# EAGLE board test4 (EAGLE 7.6.0)
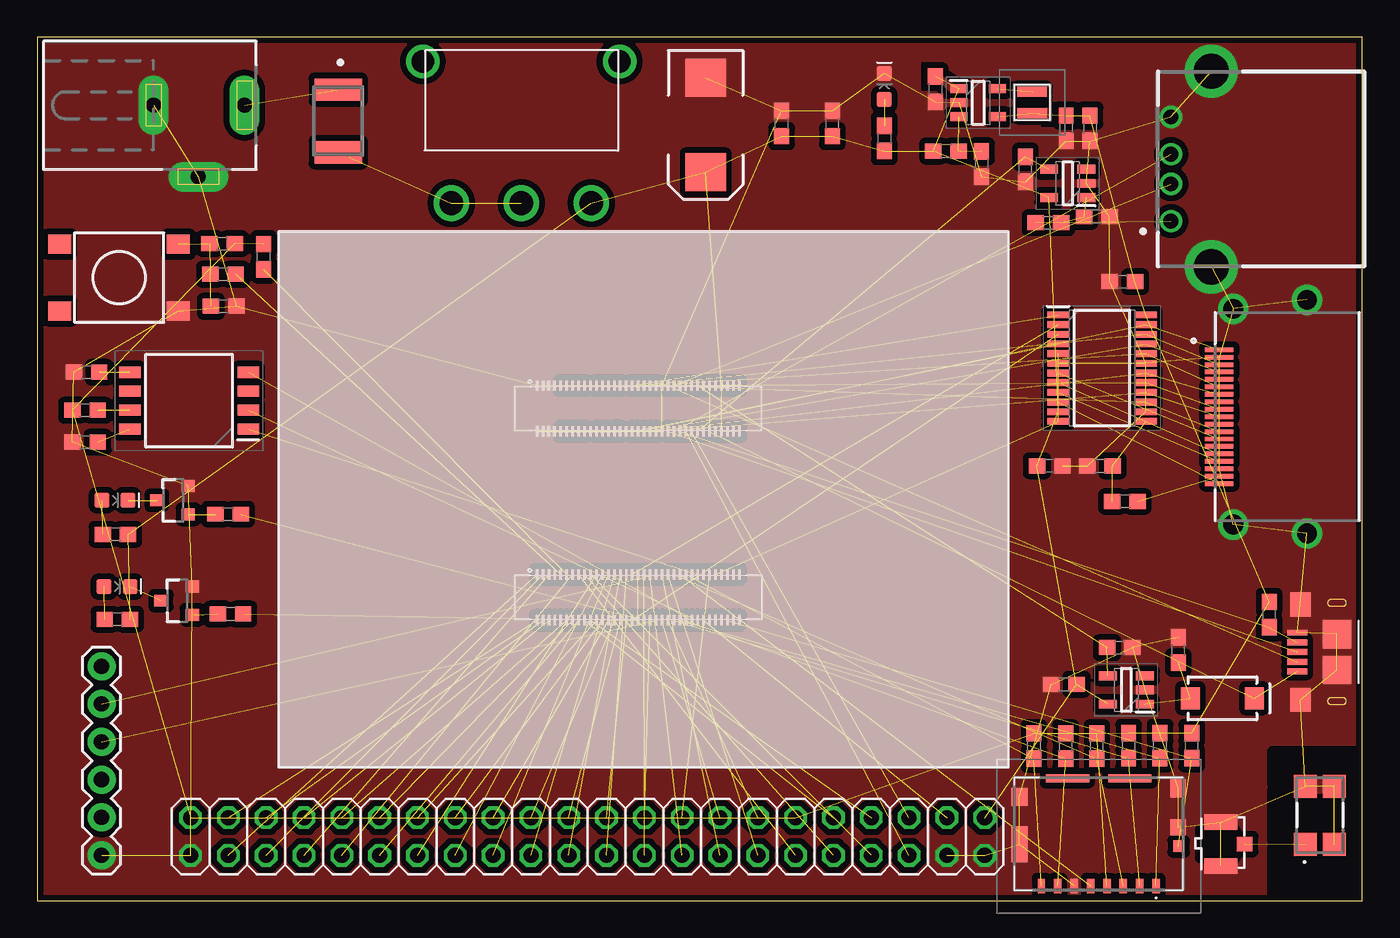
[diagram p0: board, top side]
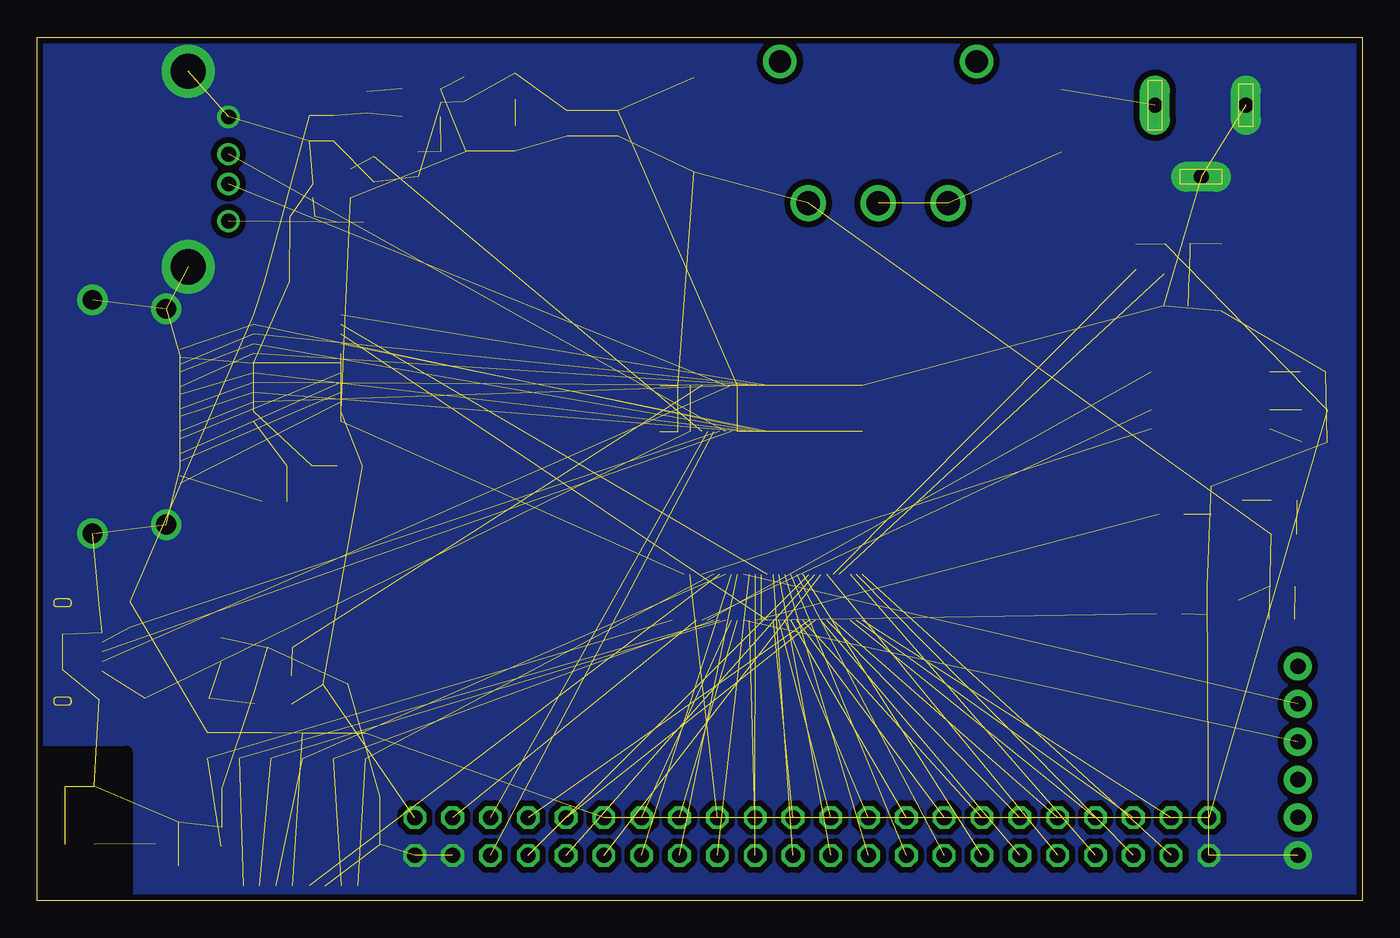
[diagram p1: board, bottom side, seen from below]

Size 89 x 58 mm. Coordinates in mm from the lower left corner, seen from the top.
Outline: 89,0 89,58 0,58 0,0 89,0
Copper layers (1*16): Top 0.035559375mm / dielectric 1.6mm / Bottom 0.035559375mm
Design rules "oshpark-2layer *": minimum track width 5mil, minimum drill 10mil, track to track 5mil, track to pad 5mil, pad to pad 5mil, via to via 5mil, smd to smd 5mil, copper to edge 15mil, drill to drill 6mil, minimum pad ring 5mil, minimum via ring 5mil, stop-mask expansion 2.5mil, vias tented up to drill 16mil, thermal gap 10mil
Net classes: 1 differential: width 0.127 mm, drill 0.3 mm, clearance 0.127 mm
bKeepout: area 78.2,2.9 to 83,4.7
tRestrict: area 78.1,2.9 to 80.4,4.7; area 83,0 to 89,2.8; area 83,2.8 to 84.3,3.6; area 83,4 to 84.3,7.4; area 83,7.9 to 84.3,8.6; area 83,8.6 to 89,10; area 84.3,4.7 to 86.9,6.8; area 87.3,4.7 to 89,6.8; area 88,2.7 to 89,4.7; area 88,6.8 to 89,8.6
bRestrict: area 83,0 to 89,10

## Footprints (pad centres in the part's own frame; a part is rotated, then mirrored left to right if it is on the bottom)
SOT95P284X122-5N = smd 1.15 x 0.6: 1 -1.3,0.953; 2 -1.3,0; 3 -1.3,-0.953; 4 1.3,-0.953; 5 1.3,0.953
146175-0001 = smd 1.54 x 1.54: 1 -0.97,-1.95; 2 0.97,-1.95; 3 0.97,1.95; 4 -0.97,1.95
EIA7343 = smd 2.55 x 2.7: A 3.17,0; C -3.17,0
0603 = smd 1.1 x 1: 1 -0.85,0; 2 0.85,0
LED-0603 = smd 1 x 1: A -0.877,0; C 0.877,0
SMA-DIODE = smd 1.27 x 1.47: A -2.15,0; C 2.15,0
MF-MSMF260-2 = smd 1.5 x 3.2: 1 -2.1,0; 2 2.1,0
SOT95P280X145-5N = smd 1.2 x 0.6: 1 -1.25,0.95; 2 -1.25,0; 3 -1.25,-0.95; 4 1.25,-0.95; 5 1.25,0.95
SOP65P640X120-24N = smd 1.475 x 0.45: 1 -2.938,3.575; 2 -2.938,2.925; 3 -2.938,2.275; 4 -2.938,1.625; 5 -2.938,0.975; 6 -2.938,0.325; 7 -2.938,-0.325; 8 -2.938,-0.975; 9 -2.938,-1.625; 10 -2.938,-2.275; 11 -2.938,-2.925; 12 -2.938,-3.575; 13 2.938,-3.575; 14 2.938,-2.925; 15 2.938,-2.275; 16 2.938,-1.625; 17 2.938,-0.975; 18 2.938,-0.325; 19 2.938,0.325; 20 2.938,0.975; 21 2.938,1.625; 22 2.938,2.275; 23 2.938,2.925; 24 2.938,3.575
DCJ0202 = drill 1 pad 2 long: 1 0,3.1; 2 4.8,0; 3 0,-3
10118193-0001LF = smd 0.4 x 1.35: D+ 0,2.675; D- -0.65,2.675; GND 1.3,2.675; ID 0.65,2.675; VCC -1.3,2.675 | smd 1.6 x 1.4: SHIELD$1 -3.2,2.45; SHIELD$2 3.2,2.45 | smd 1.9 x 1.9: SHIELD$3 -1.2,0; SHIELD$4 1.2,0
DF40C(2.0)-70DS-0.4V(51) = smd 0.2 x 0.7: 1 0,0; 2 0,-3.08; 3 0.4,0; 4 0.4,-3.08; 5 0.8,0; 6 0.8,-3.08; 7 1.2,0; 8 1.2,-3.08; 9 1.6,0; 10 1.6,-3.08; 11 2,0; 12 2,-3.08; 13 2.4,0; 14 2.4,-3.08; 15 2.8,0; 16 2.8,-3.08; 17 3.2,0; 18 3.2,-3.08; 19 3.6,0; 20 3.6,-3.08; 21 4,0; 22 4,-3.08; 23 4.4,0; 24 4.4,-3.08; 25 4.8,0; 26 4.8,-3.08; 27 5.2,0; 28 5.2,-3.08; 29 5.6,0; 30 5.6,-3.08; 31 6,0; 32 6,-3.08; 33 6.4,0; 34 6.4,-3.08; 35 6.8,0; 36 6.8,-3.08; 37 7.2,0; 38 7.2,-3.08; 39 7.6,0; 40 7.6,-3.08; 41 8,0; 42 8,-3.08; 43 8.4,0; 44 8.4,-3.08; 45 8.8,0; 46 8.8,-3.08; 47 9.2,0; 48 9.2,-3.08; 49 9.6,0; 50 9.6,-3.08; 51 10,0; 52 10,-3.08; 53 10.4,0; 54 10.4,-3.08; 55 10.8,0; 56 10.8,-3.08; 57 11.2,0; 58 11.2,-3.08; 59 11.6,0; 60 11.6,-3.08; 61 12,0; 62 12,-3.08; 63 12.4,0; 64 12.4,-3.08; 65 12.8,0; 66 12.8,-3.08; 67 13.2,0; 68 13.2,-3.08; 69 13.6,0; 70 13.6,-3.08
UE27AC54100 = drill 1 pad 1.5: 1 -3.5,0; 2 -1,0; 3 1,0; 4 3.5,0 | drill 2.38 pad 3.58: 5 -6.57,-2.71; 6 6.57,-2.71
FTDI_BASIC = drill 1.016 pad 1.88: CTS 10.16,0; DTR 0,0; GND 12.7,0; RXI 2.54,0; TXO 5.08,0; VCC 7.62,0
10029449-111RLF_1 = smd 0.3 x 1.9: 1 4.5,0.95; 2 4,0.95; 3 3.5,0.95; 4 3,0.95; 5 2.5,0.95; 6 2,0.95; 7 1.5,0.95; 8 1,0.95; 9 0.5,0.95; 10 0,0.95; 11 -0.5,0.95; 12 -1,0.95; 13 -1.5,0.95; 14 -2,0.95; 15 -2.5,0.95; 16 -3,0.95; 17 -3.5,0.95; 18 -4,0.95; 19 -4.5,0.95 | drill 1.33 pad 2.03: 20 -7.25,0; 21 -7.85,-4.95; 22 7.85,-4.95; 23 7.25,0
1051620001 = smd 0.5 x 1: 1 3.85,-3.335; 2 2.75,-3.335; 3 1.65,-3.335; 4 0.55,-3.335; 5 -0.55,-3.335; 6 -1.65,-3.335; 7 -2.75,-3.335; 8 -3.85,-3.335 | smd 0.72 x 0.78: 9 5.36,-0.655 | smd 1.05 x 1.08: 10 5.325,0.615 | smd 1.05 x 1.2: 11 5.325,3.225; 12 -5.325,2.655 | smd 1.05 x 2.39: 13 -5.325,-0.53 | smd 2.91 x 0.55: 14 -2.095,3.9; 15 2.095,3.9
NRH2412T2R2MNGH = smd 0.7 x 2: 1 -0.725,0; 2 0.725,0
SOT23-3 = smd 0.8 x 0.9: 1 -0.95,-1; 2 0.95,-1; 3 0,1.1
TACTILE_SWITCH_SMD_6.2MM_TALL = smd 1.55 x 1.3: A1 -3.975,-2.25; A2 3.975,-2.25; B1 -3.975,2.25; B2 3.975,2.25
SOIC127P844X265-8N = smd 1.45 x 0.75: 1 -3.975,1.905; 2 -3.975,0.635; 3 -3.975,-0.635; 4 -3.975,-1.905; 5 3.975,-1.905; 6 3.975,-0.635; 7 3.975,0.635; 8 3.975,1.905
2X22 = drill 1.016 octagon: 1 -25.4,-1.27; 2 -25.4,1.27; 3 -22.86,-1.27; 4 -22.86,1.27; 5 -20.32,-1.27; 6 -20.32,1.27; 7 -17.78,-1.27; 8 -17.78,1.27; 9 -15.24,-1.27; 10 -15.24,1.27; 11 -12.7,-1.27; 12 -12.7,1.27; 13 -10.16,-1.27; 14 -10.16,1.27; 15 -7.62,-1.27; 16 -7.62,1.27; 17 -5.08,-1.27; 18 -5.08,1.27; 19 -2.54,-1.27; 20 -2.54,1.27; 21 0,-1.27; 22 0,1.27; 23 2.54,-1.27; 24 2.54,1.27; 25 5.08,-1.27; 26 5.08,1.27; 27 7.62,-1.27; 28 7.62,1.27; 29 10.16,-1.27; 30 10.16,1.27; 31 12.7,-1.27; 32 12.7,1.27; 33 15.24,-1.27; 34 15.24,1.27; 35 17.78,-1.27; 36 17.78,1.27; 37 20.32,-1.27; 38 20.32,1.27; 39 22.86,-1.27; 40 22.86,1.27; 41 25.4,-1.27; 42 25.4,1.27; 43 27.94,-1.27; 44 27.94,1.27
500SSP1S1M6QEA = drill 1.6: 1 -4.8,-5.4; 2 -0.1,-5.4; 3 4.6,-5.4 | drill 1.5: 4 -6.705,4.13; 5 6.505,4.13
U.FL-R-SMT(10) = smd 1.05 x 2.2: 1 -1.475,0.2; 2 1.475,0.2 | smd 1 x 1.05: 3 0,-1.4

## Placement (x,y rotation side)
3.3V_BUCK  LM3671MF-3.3_NOPB  [SOT95P284X122-5N]  63.2,53.6 0 top
ANT1  146175-0001  [146175-0001]  86.16,5.74 0 top
C1  100uF  [EIA7343]  44.9,52.1 270 top
C2  10uF  [0603]  50,52.2 90 top
C3  0.1uF  [0603]  53.4,52.2 90 top
C4  4.7uF  [0603]  60.33,54.51 270 top
C5  10uF  [0603]  69.11,51.88 270 top
C6  0.1uF  [0603]  70.71,51.88 270 top
C7  1.0uF  [0603]  12.52,39.93 180 top
C8  4.7uF  [0603]  71.17,45.94 0 top
C9  4.7uF  [0603]  76.64,16.84 90 top
C10  10uF  [0603]  68.95,14.54 180 top
C11  0.1uF  [0603]  71.37,29.2 180 top
C12  0.1uF  [0603]  68,29.2 0 top
C13  0.1uF  [0603]  72.89,41.58 180 top
D1  Red  [LED-0603]  56.9,54.7 90 top
D2  GREEN  [LED-0603]  5.37,21.1 0 top
D3  3A/40V/500mV  [SMA-DIODE]  79.6,13.59 0 top
D4  BLUE  [LED-0603]  5.23,26.89 0 top
F1  MF-MSMF260-2  [MF-MSMF260-2]  20.22,52.37 270 top
FB1  [0603]  73.06,26.81 0 top
FB2  [0603]  67.92,45.54 180 top
IC2  TPS2051BDBVR  [SOT95P280X145-5N]  73.15,14.15 180 top
IC3  TPD12S016PWR  [SOP65P640X120-24N]  71.52,35.77 0 top
IC4  TPS2051BDBVR  [SOT95P280X145-5N]  69.21,48.18 180 top
J1  DCJ0202  [DCJ0202]  10.82,53.43 270 top
J2  10118193-0001LF  [10118193-0001LF]  87.3,16.7 90 top
J3  DF40C(2.0)-70DS-0.4V(51)  [DF40C(2.0)-70DS-0.4V(51)]  33.56,34.6 0 top
J4  DF40C(2.0)-70DS-0.4V(51)  [DF40C(2.0)-70DS-0.4V(51)]  33.56,21.91 0 top
J5  UE27AC54100  [UE27AC54100]  76.15,49.14 90 top
J6  6_PIN_SERIAL_CABLEPTH  [FTDI_BASIC]  4.32,15.74 270 top
J7  10029449-111RLF  [10029449-111RLF_1]  80.34,32.51 90 top
J8  1051620001  [1051620001]  71.3,4.31 0 top
K1  [KEEPOUT]  -11,-14 0 top  (outside the outline)
L2  NRH2412T2R2MNGH  [NRH2412T2R2MNGH]  66.83,53.61 270 top
Q1  600mA/40V  [SOT23-3]  9.42,20.15 90 top
Q2  600mA/40V  [SOT23-3]  9.14,26.89 90 top
R1  470  [0603]  56.9,51.2 270 top
R2  1k  [0603]  3.21,30.8 180 top
R3  1k  [0603]  3.21,32.95 180 top
R4  1k  [0603]  3.31,35.5 180 top
R5  10k  [0603]  61.03,50.35 180 top
R6  470  [0603]  5.38,18.9 0 top
R7  100k  [0603]  63.43,49.48 270 top
R8  10k  [0603]  12.98,19.25 0 top
R9  33  [0603]  12.48,42.07 0 top
R10  470  [0603]  5.26,24.61 0 top
R11  100k  [0603]  12.42,44.13 180 top
R12  100k  [0603]  15.21,43.25 270 top
R13  10k  [0603]  72.7,17 180 top
R14  100k  [0603]  82.75,19.21 90 top
R15  10k  [0603]  12.83,25.95 0 top
R16  100k  [0603]  66.37,49.12 90 top
R17  10k  [0603]  77.54,10.41 90 top
R18  51k  [0603]  66.95,10.38 90 top
R19  51k  [0603]  71.17,10.38 90 top
R20  10k  [0603]  69.09,10.38 90 top
R21  51k  [0603]  75.41,10.41 90 top
R22  51k  [0603]  73.3,10.41 90 top
S1  MOMENTARY-SWITCH-SPST-SMD-6.2MM-TALL  [TACTILE_SWITCH_SMD_6.2MM_TALL]  5.5,41.85 0 top
S3  218-4LPST  [SOIC127P844X265-8N]  10.2,33.59 180 top
SV1  TEST HEADER  [2X22]  35.7,4.3 0 top
SW1  500SSP1S1M6QEA  [500SSP1S1M6QEA]  32.61,52.25 0 top
U$3  U.FL-R-SMT(10)  [U.FL-R-SMT(10)]  79.69,3.8 90 top

## Library data of the parts
3.3V_BUCK = LM3671MF-3.3_NOPB; DESCRIPTION: DC-DC Converter Step-Dn 2.7-5.5V SOT23-5 Texas Instruments LM3671MF-3.3/NOPB, Step Down DC-DC Converter, 600mA, Adjustable, 1.1 3.3 V, 5-Pin SOT-23; DIGIKEY_PART_NUMBER: LM3671MF-3.3/NOPBTR-ND; HEIGHT: 1.22mm; MANUFACTURER_NAME: Texas Instruments; MANUFACTURER_PART_NUMBER: LM3671MF-3.3/NOPB
ANT1 = 146175-0001; ALLIED_NUMBER: 70904228; ALLIED_PRICE-STOCK: https://www.alliedelec.com/molex-incorporated-146175-0001/70904228/; ARROW_PART_NUMBER: 146175-0001; DESCRIPTION: Antennas 2.4/5GHz SMTOnGround MID Chip Antenna; HEIGHT: mm; MANUFACTURER_NAME: Molex; MANUFACTURER_PART_NUMBER: 146175-0001
C1 = SparkFun-Capacitors; PROD_ID: CAP-07890
C2 C5 C10 = SparkFun-Capacitors; PROD_ID: CAP-11015
C3 C6 C11-C13 = SparkFun-Capacitors; PROD_ID: CAP-00810
C4 C8 C9 = SparkFun-Capacitors; PROD_ID: CAP-08280
C7 = SparkFun-Capacitors; PROD_ID: CAP-00868
D1 = SparkFun-LED; PROD_ID: DIO-11154
D2 D4 = SparkFun-LED; PROD_ID: DIO-00821
D3 = SparkFun-DiscreteSemi; PROD_ID: DIO-09886
F1 = MF-MSMF260-2; ALLIED_NUMBER: 70153472; ALLIED_PRICE-STOCK: http://www.alliedelec.com/bourns-mf-msmf260-2/70153472/; ARROW_PART_NUMBER: MF-MSMF260-2; ARROW_PRICE-STOCK: https://www.arrow.com/en/products/mf-msmf260-2/bourns; DESCRIPTION: Fuse, PTC, Resettable, SMD, 1812, 2.6A Bourns 2.6A Surface Mount Resettable Fuse, 6 V; HEIGHT: mm; MANUFACTURER_NAME: Bourns; MANUFACTURER_PART_NUMBER: MF-MSMF260-2; RS_PART_NUMBER: 6478257P; RS_PRICE-STOCK: http://uk.rs-online.com/web/p/products/6478257P
FB1 FB2 = SparkFun-Coils; PROD_ID: NDUC-13805
IC2 IC4 = TPS2051BDBVR; ARROW_PART_NUMBER: TPS2051BDBVR; ARROW_PRICE/STOCK: https://www.arrow.com/en/products/tps2051bdbvr/texas-instruments; DESCRIPTION: TEXAS INSTRUMENTS - TPS2051BDBVR - CURRENT LIMITED POWER SWITCH, 5.5V SOT23-5, FULL REEL; HEIGHT: 1.45mm; MANUFACTURER_NAME: Texas Instruments; MANUFACTURER_PART_NUMBER: TPS2051BDBVR
IC3 = TPD12S016PWR; ARROW_PART_NUMBER: TPD12S016PWR; ARROW_PRICE/STOCK: https://www.arrow.com/en/products/tpd12s016pwr/texas-instruments; DESCRIPTION: Texas Instruments,TPD12S016PWR,IC,HDMI TPD12S016PWR, HDMI Interface 12-channel HDMI 4.5; HEIGHT: 1.2mm; MANUFACTURER_NAME: Texas Instruments; MANUFACTURER_PART_NUMBER: TPD12S016PWR; RS_PART_NUMBER: 1627865; RS_PRICE/STOCK: http://uk.rs-online.com/web/p/products/1627865
J1 = con-jack; OC_FARNELL: unknown; OC_NEWARK: unknown
J2 = 10118193-0001LF
J3 J4 = DF40C(2.0)-70DS-0.4V(51); ARROW_PART_NUMBER: DF40C(2.0)-70DS-0.4V(51); ARROW_PRICE/STOCK: https://www.arrow.com/en/products/df40c-2.0-70ds-0.4v-51/hirose-electric; DESCRIPTION: HIROSE(HRS) - DF40C(2.0)-70DS-0.4V(51) - CONNECTOR, STACKING, RCPT, 70POS, 2ROW; HEIGHT: mm; MANUFACTURER_NAME: Hirose; MANUFACTURER_PART_NUMBER: DF40C(2.0)-70DS-0.4V(51)
J5 = UE27AC54100; ARROW_PART_NUMBER: UE27AC54100; DESCRIPTION: AMPHENOL COMMERCIAL PRODUCTS - UE27AC54100 - USB, 2.0 TYPE A, RECEPTACLE, TH; HEIGHT: mm; MANUFACTURER_NAME: AMPHENOL COMMERCIAL PRODUCTS; MANUFACTURER_PART_NUMBER: UE27AC54100
J6 = SparkFun-Connectors
J7 = 10029449-111RLF; ARROW_PART_NUMBER: 10029449-111RLF; ARROW_PRICE-STOCK: https://www.arrow.com/en/products/10029449-111rlf/amphenol-fci; DESCRIPTION: HDMI, Displayport & DVI Connectors HDMI; HEIGHT: mm; MANUFACTURER_NAME: FCI; MANUFACTURER_PART_NUMBER: 10029449-111RLF
J8 = 1051620001; DESCRIPTION: 1.45H MICRO SD HEADER WITH D/C P; HEIGHT: mm; MANUFACTURER_NAME: Molex; MANUFACTURER_PART_NUMBER: 1051620001
K1 = DF40C(2.0)-70DS-0.4V(51)
L2 = NRH2412T2R2MNGH; ARROW_PART_NUMBER: NRH2412T2R2MNGH; ARROW_PRICE-STOCK: https://www.arrow.com/en/products/nrh2412t2r2mngh/taiyo-yuden; DESCRIPTION: TAIYO YUDEN - NRH2412T2R2MNGH - INDUCTOR, WIREWOUND, 2.2UH, 1A; HEIGHT: 1mm; MANUFACTURER_NAME: TAIYO YUDEN; MANUFACTURER_PART_NUMBER: NRH2412T2R2MNGH
Q1 Q2 = SparkFun-DiscreteSemi; PROD_ID: TRANS-08049
R1 R6 R10 = SparkFun-Resistors; PROD_ID: RES-07869
R2-R4 = SparkFun-Resistors; PROD_ID: RES-07856
R5 R8 R13 R15 R17-R22 = SparkFun-Resistors; PROD_ID: RES-00824
R7 R11 R12 R14 R16 = SparkFun-Resistors; PROD_ID: RES-07828
R9 = SparkFun-Resistors; PROD_ID: RES-08270
S1 = SparkFun-Switches; PROD_ID: SWCH-11966; SF_SKU: COM-12992
S3 = 218-4LPST; ARROW_PART_NUMBER: 218-4LPST; ARROW_PRICE/STOCK: https://www.arrow.com/en/products/218-4lpst/cts; DESCRIPTION: Half Pitch, SMD DIP Switch; HEIGHT: 2.65mm; MANUFACTURER_NAME: CTS; MANUFACTURER_PART_NUMBER: 218-4LPST
SV1 = pinhead
SW1 U$3 = ARTIK530_EAGLE_LIB

## Nets
3.3V: 3.3V_BUCK.4 C5.1 C6.1 C13.1 IC3.24 J8.4 L2.2 R3.2 R11.1 R12.1 R14.2 R17.2 R18.2 R19.2 R20.2 R21.2 R22.2 SV1.2 SV1.34
5V: 3.3V_BUCK.1 C1.A C2.1 C3.1 C4.1 C10.1 C12.1 IC2.5 IC3.11 IC4.5 J3.63 J3.64 J3.65 J3.66 J3.67 J3.68 J3.69 J3.70 R1.2 R5.2 R6.2 R10.2 SV1.44 SW1.3
GND: 3.3V_BUCK.2 ANT1.2 ANT1.3 ANT1.4 C1.C C2.2 C3.2 C4.2 C5.2 C6.2 C7.1 C8.2 C9.2 C10.2 C11.2 C12.2 C13.2 D1.C IC2.2 IC3.6 IC3.14 IC3.19 IC4.2 J1.2 J1.3 J2.GND J2.SHIELD$1 J2.SHIELD$2 J2.SHIELD$3 J2.SHIELD$4 J3.1 J3.2 J3.3 J3.4 J3.5 J3.6 J3.7 J3.8 J3.19 J3.20 J3.31 J3.32 J3.43 J3.44 J5.4 J5.5 J5.6 J6.GND J7.2 J7.5 J7.8 J7.11 J7.17 J7.20 J7.21 J7.22 J7.23 J8.6 J8.10 J8.11 J8.12 J8.13 Q1.2 Q2.2 R2.2 R4.2 R7.2 R13.1 R16.1 S1.A2 SV1.1 SV1.41 SV1.43 U$3.1 U$3.2
N$1: F1.1 J1.1
N$2: F1.2 SW1.1 SW1.2
N$3: 3.3V_BUCK.5 L2.1
N$4: D1.A R1.1
N$5: R2.1 S3.8
N$6: R3.1 S3.7
N$7: R4.1 S3.5
N$8: D2.A R6.1
N$9: 3.3V_BUCK.3 R5.1 R7.1
N$10: D2.C Q1.3
N$11: Q1.1 R8.1
N$12: C7.2 R9.1 R11.2 S1.B2
N$13: D4.A R10.1
N$14: C11.1 FB1.1 IC3.13
N$15: C9.1 D3.A IC2.1
N$16: IC3.7 J7.13
N$17: IC3.8 J7.15
N$18: IC3.9 J7.16
N$19: IC3.10 J7.19
N$20: D4.C Q2.3
N$21: Q2.1 R15.1
N$22: FB1.2 J7.18
N$23: C8.1 FB2.1 IC4.1
N$24: FB2.2 J5.1
N$32: ANT1.1 U$3.3
VCC5P0_OTG: D3.C J2.VCC J3.59 J3.60
VSYS_IO_3P3: J4.35 J4.36 R8.2
XADC0: J4.3 SV1.5
XADC1: J4.4 SV1.6
XADC2: J4.5 SV1.7
XADC3: J4.6 SV1.8
XADC4: J4.1 SV1.3
XADC5: J4.2 SV1.4
XAGP1: J4.10
XAGP2: J4.8
XAUDIO_IRQ: J4.58 SV1.42
XAUDIO_SCL: J3.52 SV1.39
XAUDIO_SDA: J3.54 SV1.40
XBOOT_CONFIG0: J4.55 S3.1
XBOOT_CONFIG1: J4.56 S3.2
XBOOT_CONFIG3: J4.54 S3.4
XDEBUG_RX: J4.42 J6.TXO
XDEBUG_TX: J4.41 J6.RXI
XGPA3: J4.70
XGPA6: J4.63
XGPA15: IC2.4 J3.55 R13.2
XGPA16: IC4.4 J3.56 R16.2
XGPA17: J4.68
XGPA21: IC3.5 IC3.12 J4.61
XGPB22: J4.64
XGPC0: J4.57
XGPC25: J4.65
XGPE30: J4.60
XGPE31: J4.67
XGPIO0: J4.12 SV1.10
XGPIO1: J4.13 SV1.9
XGPIO2: J4.14 SV1.12
XGPIO3: J4.16 SV1.11
XGPIO4: J4.37 SV1.25
XGPIO5: J4.40 SV1.26
XGPIO6: J4.39 SV1.27
XGPIO7: J4.59 SV1.28
XHDMI_CEC: IC3.1 J3.33
XHDMI_HPD: IC3.4 J3.34
XHDMI_I2C_SCL: IC3.2 J4.33
XHDMI_I2C_SDA: IC3.3 J4.34
XHDMI_TX0_N: IC3.17 J3.39 J7.9
XHDMI_TX0_P: IC3.18 J3.40 J7.7
XHDMI_TX1_N: IC3.20 J3.37 J7.6
XHDMI_TX1_P: IC3.21 J3.38 J7.4
XHDMI_TX2_N: IC3.22 J3.35 J7.3
XHDMI_TX2_P: IC3.23 J3.36 J7.1
XHDMI_TXC_N: IC3.15 J3.41 J7.12
XHDMI_TXC_P: IC3.16 J3.42 J7.10
XI2C_SCL0: J4.31 SV1.23
XI2C_SCL1: J4.29 SV1.21
XI2C_SCL2: J4.27 SV1.19
XI2C_SDA0: J4.32 SV1.24
XI2C_SDA1: J4.30 SV1.22
XI2C_SDA2: J4.28 SV1.20
XI2S0_BCLK: J4.19 SV1.37
XI2S0_DIN: J4.18 SV1.36
XI2S0_DOUT: J4.17 SV1.35
XI2S0_LRCLK: J4.15 SV1.33
XI2S0_MCLK: J4.20 SV1.38
XMIPICSI_D0_N: J3.11
XMIPICSI_D0_P: J3.12
XMIPICSI_D1_N: J3.13
XMIPICSI_D1_P: J3.14
XMIPICSI_D2_N: J3.15
XMIPICSI_D2_P: J3.16
XMIPICSI_D3_N: J3.17
XMIPICSI_D3_P: J3.18
XMIPICSI_DCLK_N: J3.9
XMIPICSI_DCLK_P: J3.10
XMIPIDSI_D0_N: J3.23
XMIPIDSI_D0_P: J3.24
XMIPIDSI_D1_N: J3.25
XMIPIDSI_D1_P: J3.26
XMIPIDSI_D2_N: J3.27
XMIPIDSI_D2_P: J3.28
XMIPIDSI_D3_N: J3.29
XMIPIDSI_D3_P: J3.30
XMIPIDSI_DCLK_N: J3.21
XMIPIDSI_DCLK_P: J3.22
XNRESET: J4.11 R12.2
XOTG_D_N: J2.D- J3.45
XOTG_D_P: J2.D+ J3.46
XOTG_ID: J2.ID J3.50 R14.1
XPGC27: J4.62
XPWERKEY: J4.9 R9.2
XPWM0: J4.26 SV1.18
XPWM1: J4.25 SV1.17
XSD0_CDN: J4.66 J8.9 R17.1
XSD0_CLK: J4.49 J8.5
XSD0_CMD: J4.47 J8.3 R19.1
XSD0_D0: J4.52 J8.7 R20.1
XSD0_D1: J4.51 J8.8 R18.1
XSD0_D2: J4.50 J8.1 R21.1
XSD0_D3: J4.48 J8.2 R22.1
XSPI_CLK: J4.23 SV1.15
XSPI_CS: J4.24 SV1.16
XSPI_MISO: J4.21 SV1.13
XSPI_MOSI: J4.22 SV1.14
XUART_RX0: J4.46 SV1.32
XUART_RX1: J4.44 SV1.30
XUART_TX0: J4.45 SV1.31
XUART_TX1: J4.43 SV1.29
XUSBH_D_N: J3.47 J5.2
XUSBH_D_P: J3.48 J5.3
XVDDPWRON: J4.38 R15.2

## Tracks (layer width: path | path; a pad name or v marks a point on that pad's centre or on a via)
3.3V  (18 unrouted)
  pour Top (no thermals): 67.82,53.26 67.84,53.23 67.84,52.4 67.87,52.37
5V  (23 unrouted)
  pour Top (no thermals): 59.87,55.9 62.41,54.3 61.39,54.3 60.83,54.86 59.87,54.86
GND  (74 unrouted)
  pour Bottom (isolate 0.406, rank 2, no thermals): 0,58 0,0.2 0.2,0 88.96,-0.1 88.96,57.9
  pour Top (isolate 0.406, rank 2, no thermals): 0,58 0,0.2 0.2,0 88.93,0 88.93,58
N$1  (1 unrouted)
N$2  (2 unrouted)
N$3  (1 unrouted)
N$4  (1 unrouted)
N$5  (1 unrouted)
N$6  (1 unrouted)
N$7  (1 unrouted)
N$8  (1 unrouted)
N$9  (2 unrouted)
N$10  (1 unrouted)
N$11  (1 unrouted)
N$12  (3 unrouted)
N$13  (1 unrouted)
N$14  (2 unrouted)
N$15  (2 unrouted)
N$16  (1 unrouted)
N$17  (1 unrouted)
N$18  (1 unrouted)
N$19  (1 unrouted)
N$20  (1 unrouted)
N$21  (1 unrouted)
N$22  (1 unrouted)
N$23  (2 unrouted)
N$24  (1 unrouted)
N$32  (1 unrouted)
VCC5P0_OTG  (3 unrouted)
VSYS_IO_3P3  (2 unrouted)
XADC0  (1 unrouted)
XADC1  (1 unrouted)
XADC2  (1 unrouted)
XADC3  (1 unrouted)
XADC4  (1 unrouted)
XADC5  (1 unrouted)
XAUDIO_IRQ  (1 unrouted)
XAUDIO_SCL  (1 unrouted)
XAUDIO_SDA  (1 unrouted)
XBOOT_CONFIG0  (1 unrouted)
XBOOT_CONFIG1  (1 unrouted)
XBOOT_CONFIG3  (1 unrouted)
XDEBUG_RX  (1 unrouted)
XDEBUG_TX  (1 unrouted)
XGPA15  (2 unrouted)
XGPA16  (2 unrouted)
XGPA21  (2 unrouted)
XGPIO0  (1 unrouted)
XGPIO1  (1 unrouted)
XGPIO2  (1 unrouted)
XGPIO3  (1 unrouted)
XGPIO4  (1 unrouted)
XGPIO5  (1 unrouted)
XGPIO6  (1 unrouted)
XGPIO7  (1 unrouted)
XHDMI_CEC  (1 unrouted)
XHDMI_HPD  (1 unrouted)
XHDMI_I2C_SCL  (1 unrouted)
XHDMI_I2C_SDA  (1 unrouted)
XHDMI_TX0_N  (2 unrouted)
XHDMI_TX0_P  (2 unrouted)
XHDMI_TX1_N  (2 unrouted)
XHDMI_TX1_P  (2 unrouted)
XHDMI_TX2_N  (2 unrouted)
XHDMI_TX2_P  (2 unrouted)
XHDMI_TXC_N  (2 unrouted)
XHDMI_TXC_P  (2 unrouted)
XI2C_SCL0  (1 unrouted)
XI2C_SCL1  (1 unrouted)
XI2C_SCL2  (1 unrouted)
XI2C_SDA0  (1 unrouted)
XI2C_SDA1  (1 unrouted)
XI2C_SDA2  (1 unrouted)
XI2S0_BCLK  (1 unrouted)
XI2S0_DIN  (1 unrouted)
XI2S0_DOUT  (1 unrouted)
XI2S0_LRCLK  (1 unrouted)
XI2S0_MCLK  (1 unrouted)
XNRESET  (1 unrouted)
XOTG_D_N  (1 unrouted)
XOTG_D_P  (1 unrouted)
XOTG_ID  (2 unrouted)
XPWERKEY  (1 unrouted)
XPWM0  (1 unrouted)
XPWM1  (1 unrouted)
XSD0_CDN  (2 unrouted)
XSD0_CLK  (1 unrouted)
XSD0_CMD  (2 unrouted)
XSD0_D0  (2 unrouted)
XSD0_D1  (2 unrouted)
XSD0_D2  (2 unrouted)
XSD0_D3  (2 unrouted)
XSPI_CLK  (1 unrouted)
XSPI_CS  (1 unrouted)
XSPI_MISO  (1 unrouted)
XSPI_MOSI  (1 unrouted)
XUART_RX0  (1 unrouted)
XUART_RX1  (1 unrouted)
XUART_TX0  (1 unrouted)
XUART_TX1  (1 unrouted)
XUSBH_D_N  (1 unrouted)
XUSBH_D_P  (1 unrouted)
XVDDPWRON  (1 unrouted)